# EAGLE board power electronicsV4.5 (EAGLE 9.6.2)
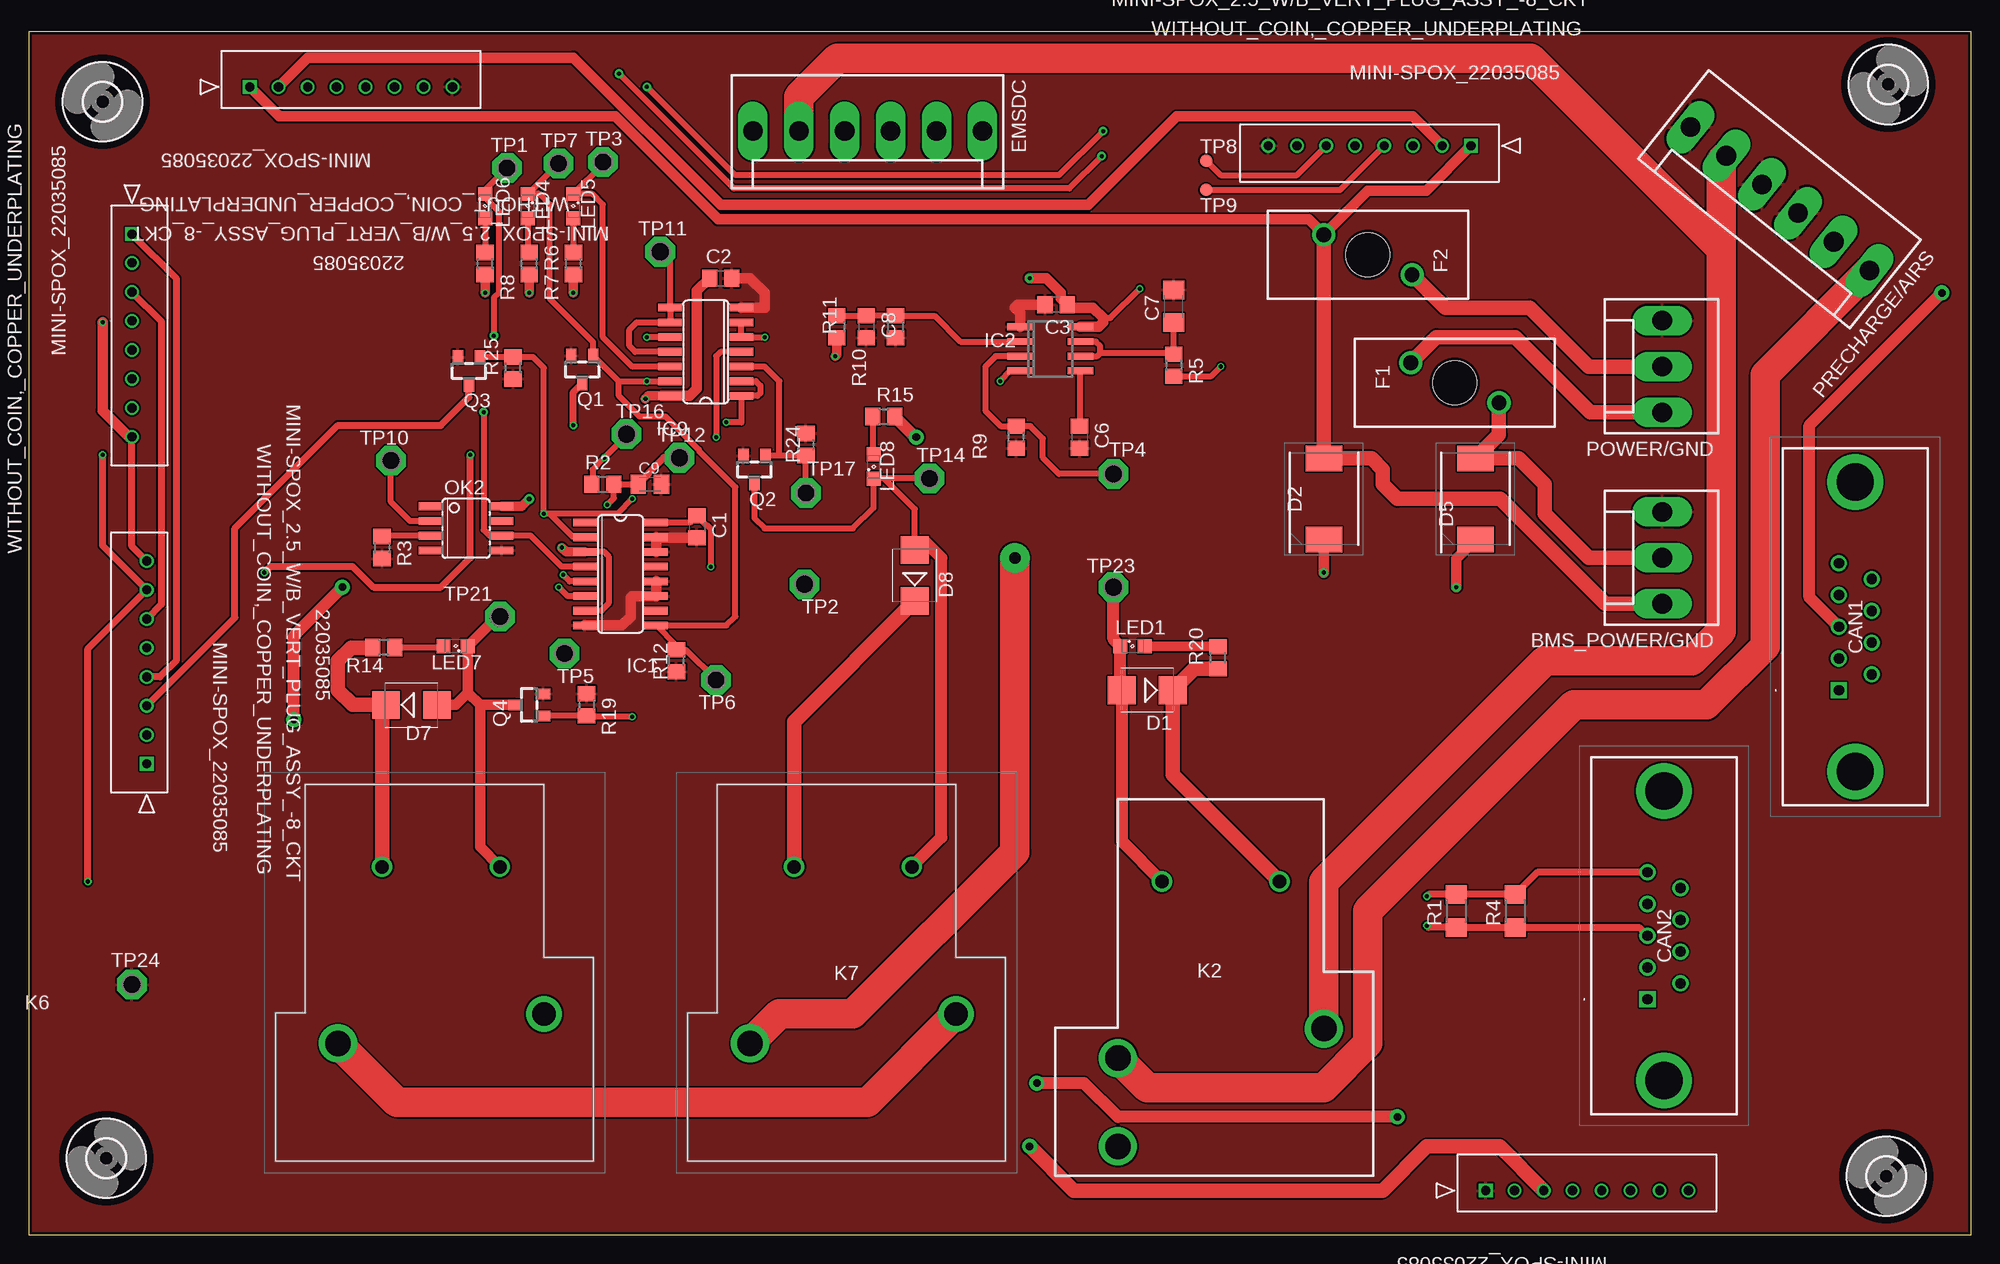
[diagram p0: board, top side]
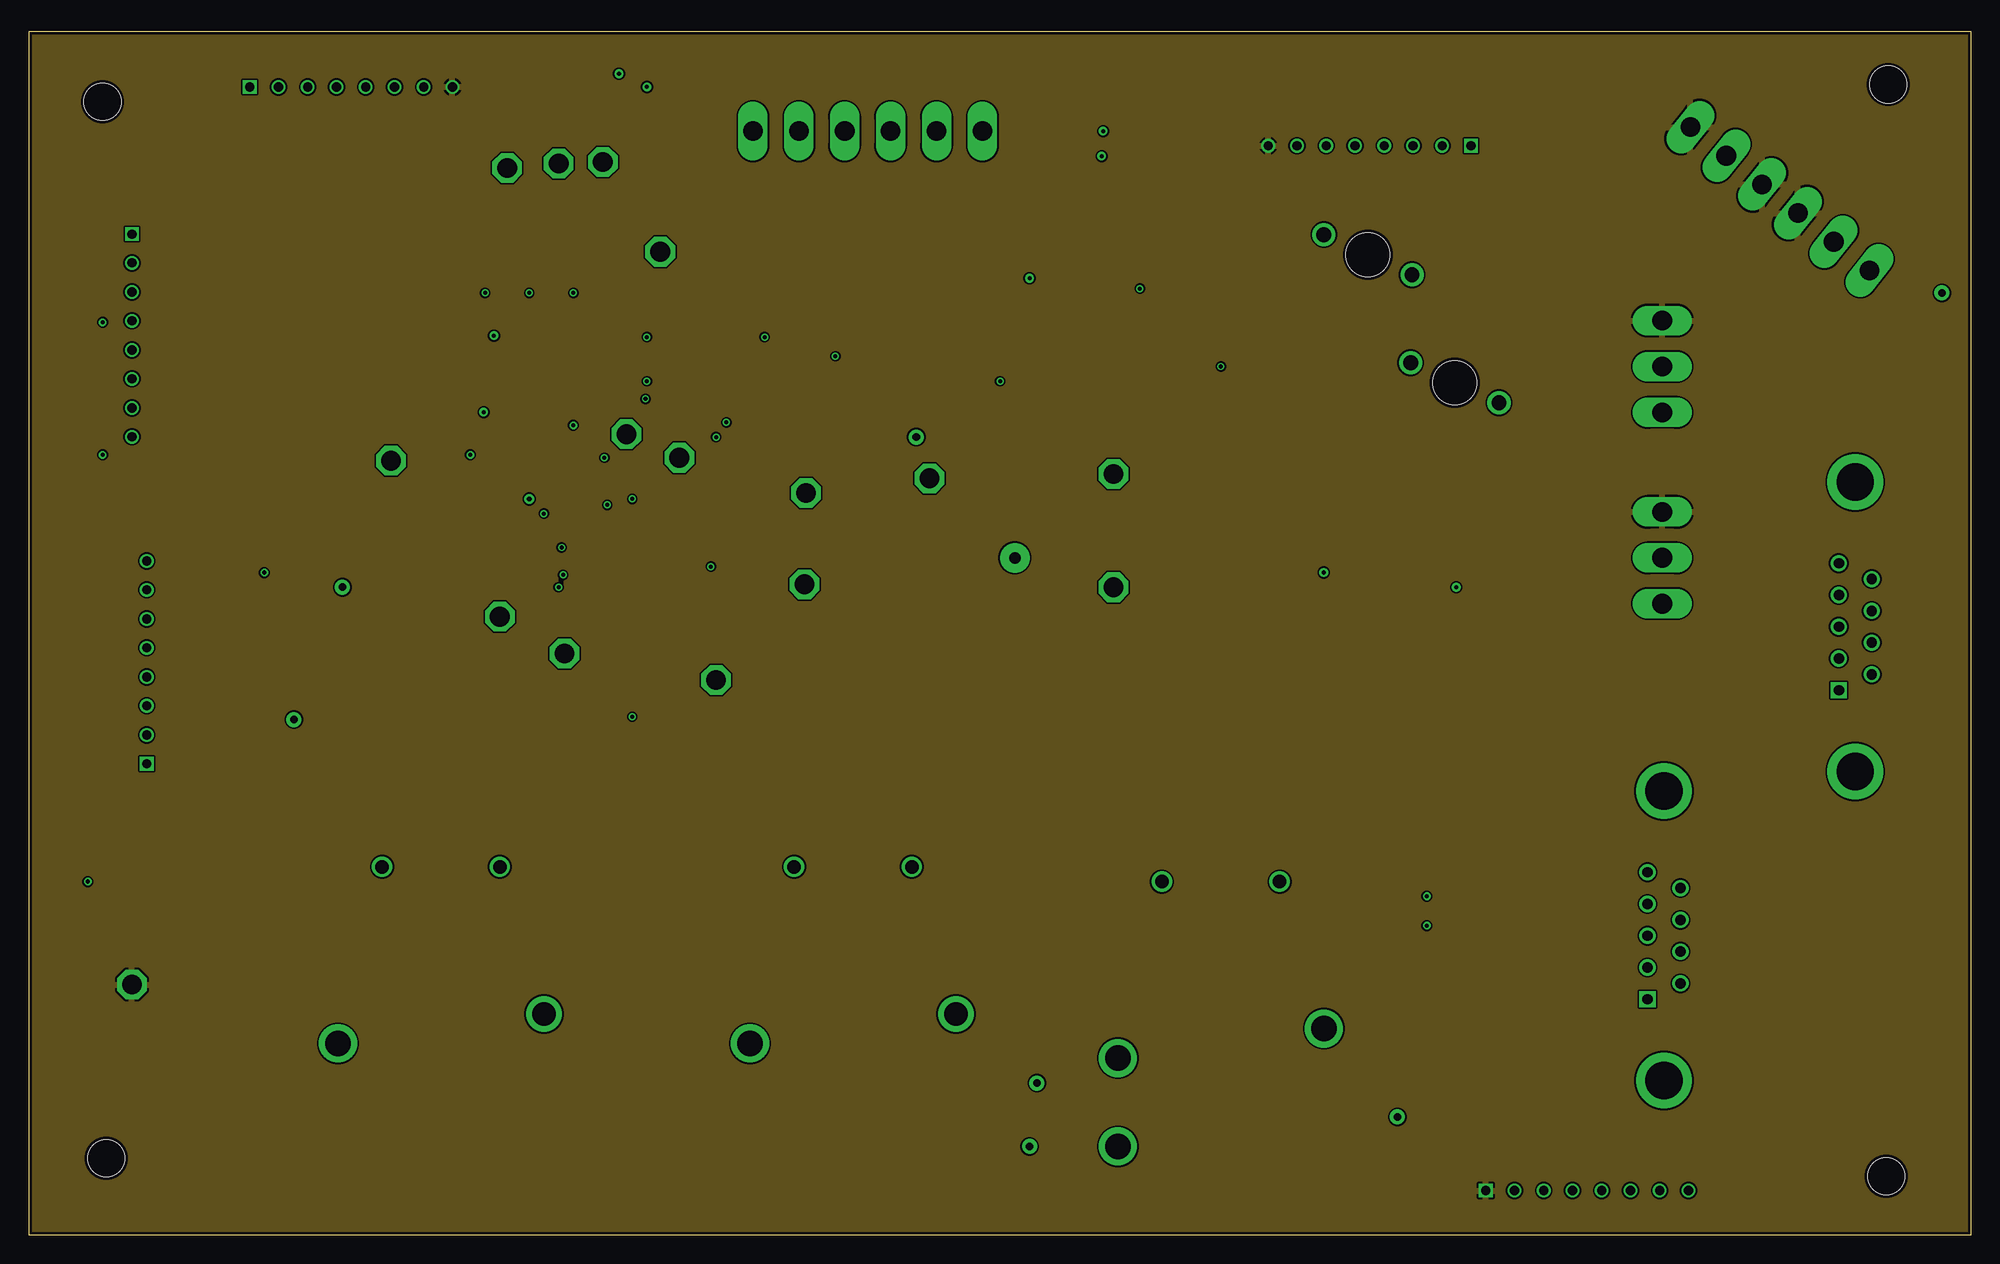
[diagram p1: board, inner layer Route2]
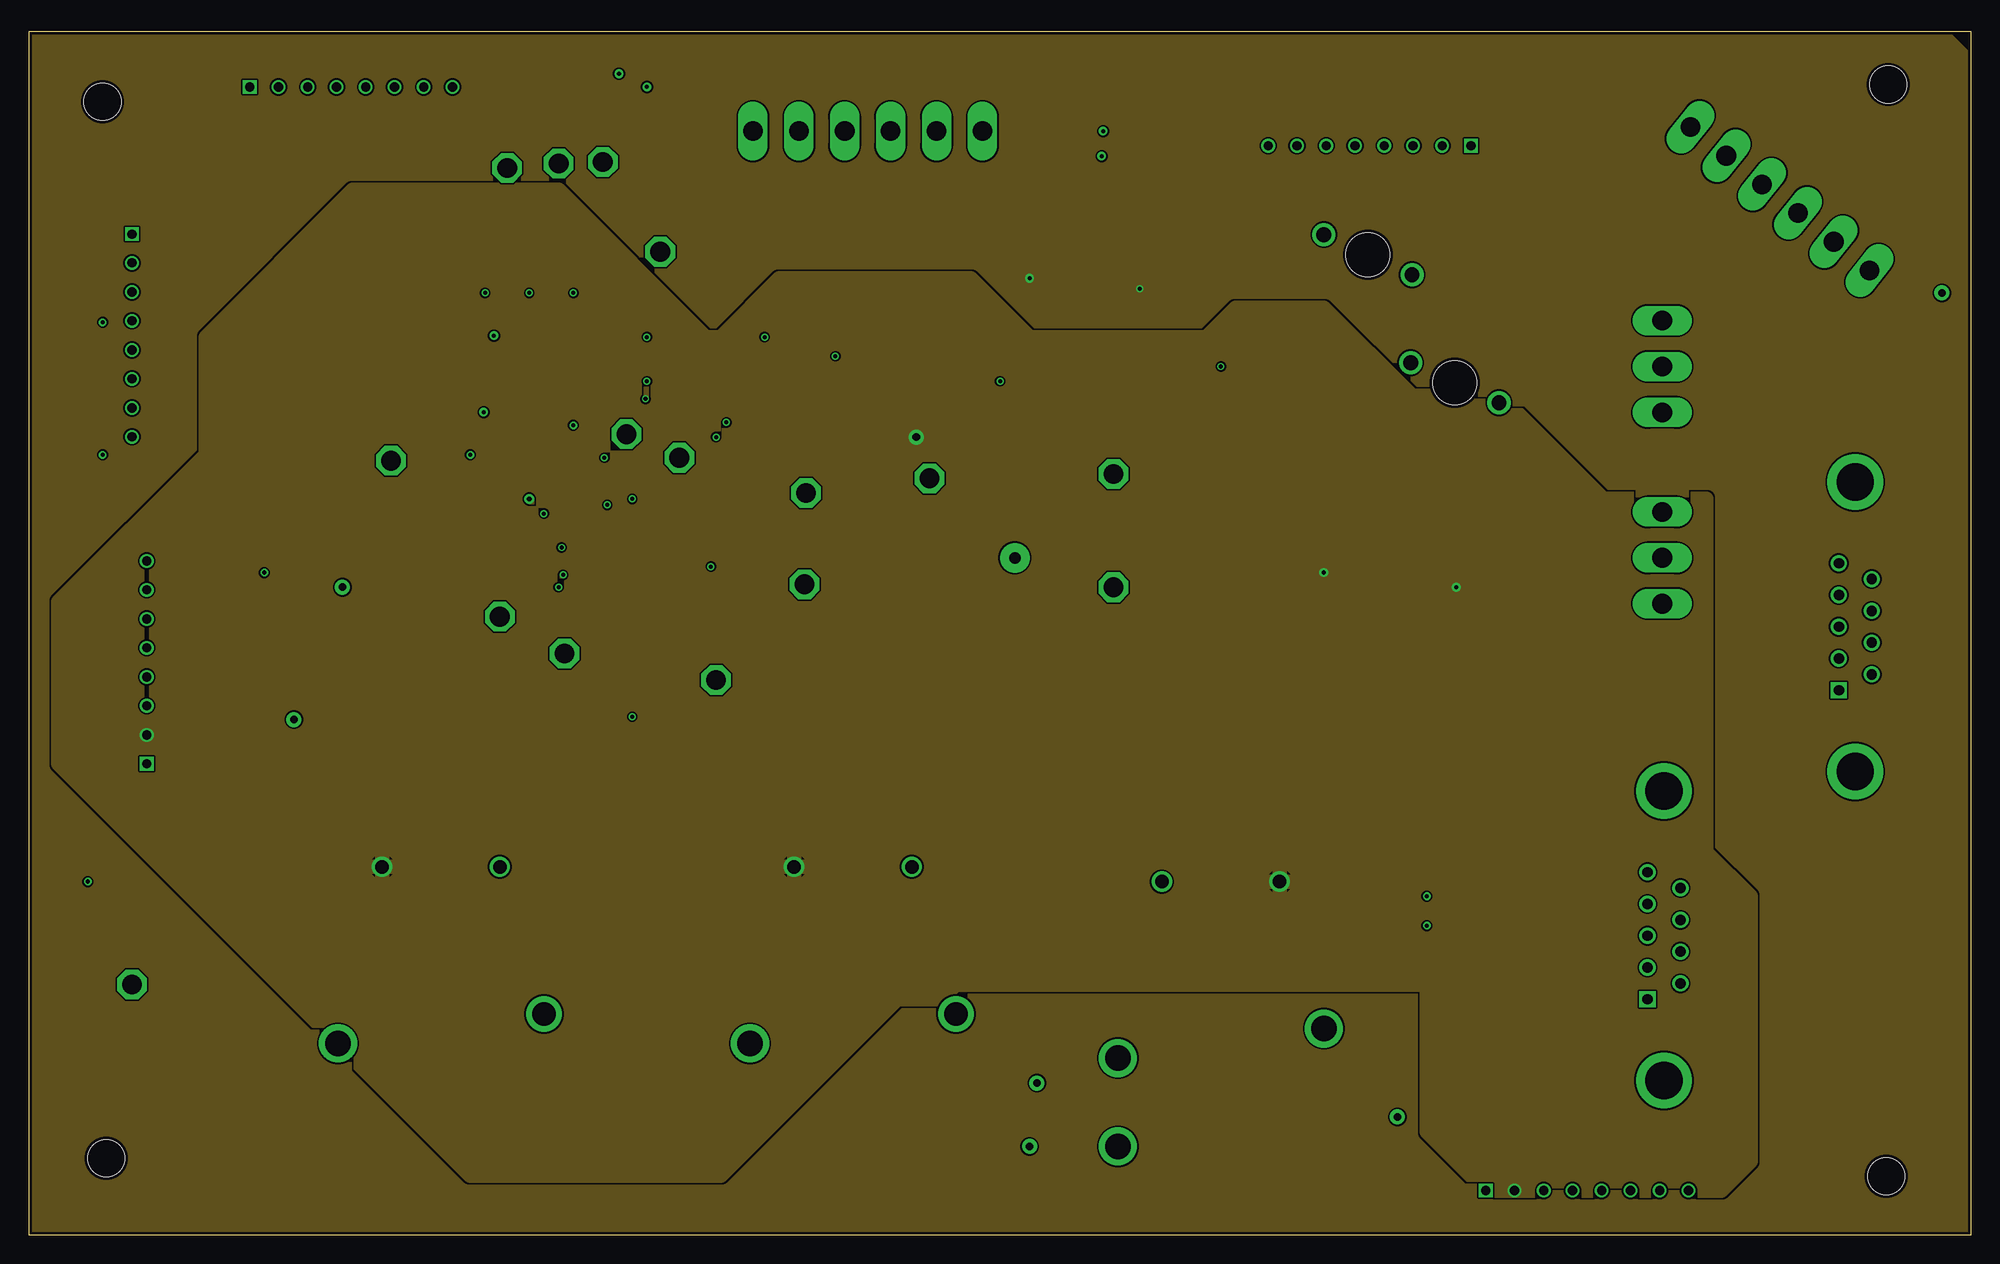
[diagram p2: board, inner layer Route15]
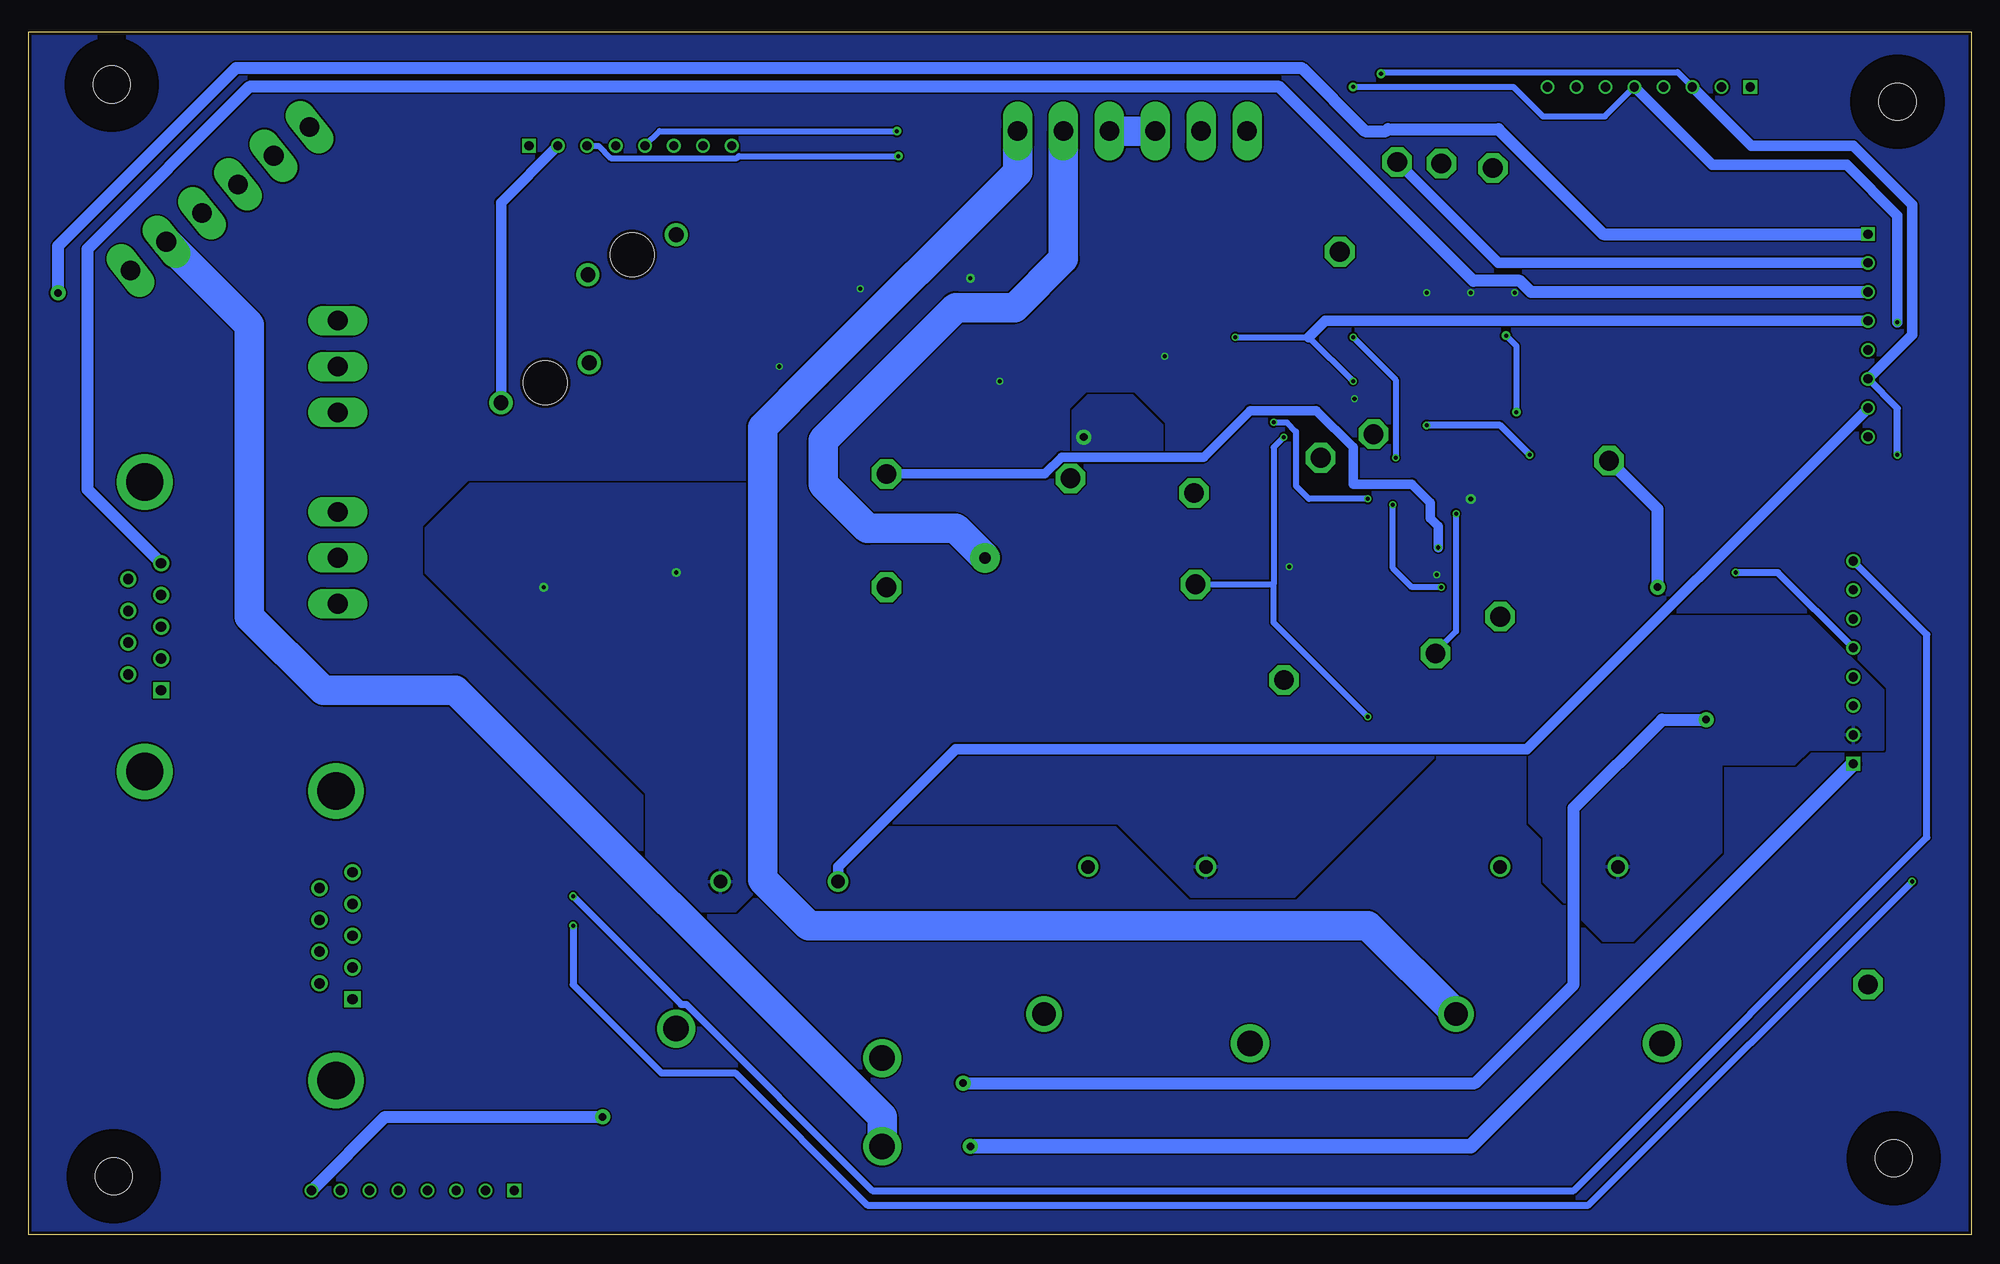
[diagram p3: board, bottom side, seen from below]

Size 167.62 x 103.81 mm. Coordinates in mm from the lower left corner, seen from the top.
Outline: 0,0 167.62,0 167.62,103.81 0,103.81 0,0
Copper layers (1*16): Top 0.018mm / dielectric 1.55mm / Bottom 0.018mm
Design rules "eC_2Layer_PClass6_BaseCopperO18_eCDefault": minimum track width 0.15mm, minimum drill 0.35mm, track to track 0.15mm, track to pad 0.15mm, pad to pad 0.15mm, via to via 0.15mm, smd to smd 0mil, copper to edge 0.25mm, drill to drill 0.35mm, minimum pad ring 0.175mm, minimum via ring 0.125mm, stop-mask expansion 0mil, vias tented up to drill 0.45mm, thermal gap 0.2mm
Net classes: 0 default: width 0.508 mm; 1 GND: width 0.889 mm; 2 EMSDC: width 2.54 mm; 3 power: width 0.889 mm

## Footprints (pad centres in the part's own frame; a part is rotated, then mirrored left to right if it is on the bottom)
CON_22035085_MOL = drill 0.787 pad 1.143 square: 1 0,0 | drill 0.787 pad 1.143: 2 -2.489,0; 3 -5.004,0; 4 -7.493,0; 5 -10.008,0; 6 -12.497,0; 7 -15.011,0; 8 -17.501,0
KK-156-3 = drill 1.7 pad 2.184 long: 1 -3.96,0; 2 0,0; 3 3.96,0
C0805 = smd 1.3 x 1.5: 1 -0.95,0; 2 0.95,0
C1206 = smd 1.6 x 1.8: 1 -1.4,0; 2 1.4,0
C0805K = smd 1.3 x 1.6: 1 -1,0; 2 1,0
LD09P24A4GV00LF = drill 0.9 pad 1.4 square: 1 0,0 | drill 0.9 pad 1.4: 2 2.74,0; 3 5.48,0; 4 8.22,0; 5 10.96,0; 6 1.37,-2.84; 7 4.11,-2.84; 8 6.85,-2.84; 9 9.59,-2.84 | drill 3.2 pad 4.8: MH1 -7.015,-1.42; MH2 17.975,-1.42
SMB = smd 2.4 x 2.4: A 2.2,0; C -2.2,0
DIOM7959X262N = smd 2.2 x 3.15: 1 -3.5,0; 2 3.5,0
KK-156-6 = drill 1.7 pad 2.184 long: 1 -9.9,0; 2 -5.94,0; 3 -1.98,0; 4 1.98,0; 5 5.94,0; 6 9.9,0
01530008 = drill 1.27 pad 2: 1 1.727,3.81; 2 -1.727,-3.81 | hole 3.785: 0,0
3,2 = hole 3.2: 0,0
SO16 = smd 0.66 x 2.032: 1 -4.445,-3.073; 2 -3.175,-3.073; 3 -1.905,-3.073; 4 -0.635,-3.073; 5 0.635,-3.073; 6 1.905,-3.073; 7 3.175,-3.073; 8 4.445,-3.073; 9 4.445,3.073; 10 3.175,3.073; 11 1.905,3.073; 12 0.635,3.073; 13 -0.635,3.073; 14 -1.905,3.073; 15 -3.175,3.073; 16 -4.445,3.073
SO08 = smd 0.6 x 2.2: 1 -1.905,-2.6; 2 -0.635,-2.6; 3 0.635,-2.6; 4 1.905,-2.6; 5 1.905,2.6; 6 0.635,2.6; 7 -0.635,2.6; 8 -1.905,2.6
SO14 = smd 0.66 x 2.032: 1 -3.81,-3.073; 2 -2.54,-3.073; 3 -1.27,-3.073; 4 0,-3.073; 5 1.27,-3.073; 6 2.54,-3.073; 7 3.81,-3.073; 8 3.81,3.073; 9 2.54,3.073; 10 1.27,3.073; 11 0,3.073; 12 -1.27,3.073; 13 -2.54,3.073; 14 -3.81,3.073
T9AS1D12 = drill 2.19 pad 3.29: 1 -8.89,12.7; 2 8.89,15.24; 3 8.89,22.86 | drill 1.17 pad 1.77: 4 -5.08,0; 5 5.08,0
T9AS1D1248T9A = drill 1.17 pad 1.755: 1 0,0; 2 -10.16,0 | drill 2.06 pad 3.09: 3 -13.97,12.7 | drill 2.19 pad 3.3: 4 3.81,15.24
SML0805 = smd 1.2 x 1.2: A 1.05,0; C -1.05,0
SOIC08 = smd 0.66 x 2.032: 1 -1.905,-3.073; 2 -0.635,-3.073; 3 0.635,-3.073; 4 1.905,-3.073; 5 1.905,3.073; 6 0.635,3.073; 7 -0.635,3.073; 8 -1.905,3.073
SOT23 = smd 0.9 x 1.2: 1 -0.95,-1.2; 2 0.95,-1.2; 3 0,1.2
R1206 = smd 1.6 x 1.803: 1 -1.422,0; 2 1.422,0
R0805 = smd 1.3 x 1.5: 1 -0.95,0; 2 0.95,0
P1-17 = drill 1.702 pad 2.54 octagon: TP 0,0
TP11R = smd 1.1 x 1.1: TP 0,0

## Placement (x,y rotation side)
BMS_I/O  MINI-SPOX_22035085  [CON_22035085_MOL]  8.89,86.36 90 top
BMS_POWER/GND  [KK-156-3]  140.97,58.42 90 top
C1  0.1uF  [C0805]  57.66,61.09 270 top
C2  0.1uF  [C0805]  59.69,82.55 0 top
C3  0.1uF  [C0805]  88.65,80.26 180 top
C6  0.1uF  [C0805]  90.68,68.83 270 top
C7  22uF  [C1206]  98.81,80.14 90 top
C8  10uF  [C0805]  72.26,78.36 270 top
C9  DNP  [C0805K]  53.59,64.77 0 top
CAN1  LD09P24A4GV00LF  [LD09P24A4GV00LF]  156.21,46.99 90 top
CAN2  LD09P24A4GV00LF  [LD09P24A4GV00LF]  139.7,20.32 90 top
D1  ES2D  [SMB]  96.52,46.99 180 top
D2  VS-30BQ100-M3_9AT  [DIOM7959X262N]  111.76,63.5 90 top
D5  VS-30BQ100-M3_9AT  [DIOM7959X262N]  124.84,63.5 90 top
D7  ES2D  [SMB]  33.02,45.72 0 top
D8  ES2D  [SMB]  76.45,56.9 90 top
EMSDC  [KK-156-6]  72.39,95.25 180 top
F1  01530008Z  [01530008]  123.06,73.53 270 top
F2  01530008Z  [01530008]  115.57,84.58 90 top
H1  MOUNT-HOLE3.2  [3,2]  6.35,97.79 90 top
H2  MOUNT-HOLE3.2  [3,2]  6.68,6.6 0 top
H3  MOUNT-HOLE3.2  [3,2]  160.48,99.28 0 top
H4  MOUNT-HOLE3.2  [3,2]  160.3,5.04 90 top
IC1  4043D  [SO16]  51.05,57.02 270 top
IC2  SE555D  [SO08]  88.14,76.45 270 top
IC9  4011D  [SO14]  58.42,76.2 90 top
ISOMETER_I/O  MINI-SPOX_22035085  [CON_22035085_MOL]  125.73,3.81 180 top
K2  T9AS5D12-12=T9A  [T9AS1D12]  102.87,30.48 180 top
K6  T9AS1D12-48=T9A  [T9AS1D1248T9A]  30.48,31.75 180 top
K7  T9AS1D12-48=T9A  [T9AS1D1248T9A]  66.04,31.75 180 top
LED1  [SML0805]  95.25,50.8 0 top
LED4  [SML0805]  43.05,88.77 270 top
LED5  [SML0805]  46.99,88.77 270 top
LED6  [SML0805]  39.37,88.77 270 top
LED7  [SML0805]  36.83,50.8 180 top
LED8  [SML0805]  72.9,66.29 90 top
MISC_I/O  MINI-SPOX_22035085  [CON_22035085_MOL]  10.16,40.64 270 top
OK2  HCPL0453  [SOIC08]  37.72,60.96 270 top
POWER/GND  [KK-156-3]  140.97,74.93 90 top
PRECHARGE/AIRS  [KK-156-6]  151.13,89.41 141.3 top
Q1  BSS138  [SOT23]  47.75,74.68 180 top
Q2  BSS138  [SOT23]  62.61,66.04 180 top
Q3  BSS138  [SOT23]  37.97,74.55 180 top
Q4  BSS138  [SOT23]  43.18,45.72 90 top
R1  120  [R1206]  123.19,27.94 90 top
R2  0R  [R0805]  49.53,64.77 0 top
R3  2.2K  [R0805]  30.48,59.31 270 top
R4  120  [R1206]  128.27,27.94 90 top
R5  100K  [R0805]  98.81,75.06 270 top
R6  330  [R0805]  46.99,83.82 90 top
R7  330  [R0805]  43.18,83.82 90 top
R8  330  [R0805]  39.37,83.82 90 top
R9  10K  [R0805]  85.22,68.83 90 top
R10  200K  [R0805]  69.72,78.36 270 top
R11  510K  [R0805]  74.8,78.36 90 top
R12  [R0805]  55.88,49.53 90 top
R14  [R0805]  30.61,50.67 180 top
R15  [R0805]  73.79,70.61 0 top
R19  [R0805]  48.13,45.72 270 top
R20  1.2K  [R0805]  102.62,49.78 90 top
R24  [R0805]  67.06,68.2 270 top
R25  [R0805]  41.78,74.8 90 top
THERMAL_EX_I/0  MINI-SPOX_22035085  [CON_22035085_MOL]  124.46,93.98 0 top
TP1  TPPAD1-17  [P1-17]  41.27,92.08 0 top
TP2  TPPAD1-17  [P1-17]  66.93,56.13 0 top
TP3  TPPAD1-17  [P1-17]  49.53,92.58 0 top
TP4  TPPAD1-17  [P1-17]  93.6,65.66 0 top
TP5  TPPAD1-17  [P1-17]  46.23,50.16 0 top
TP6  TPPAD1-17  [P1-17]  59.31,47.88 0 top
TP7  TPPAD1-17  [P1-17]  45.72,92.46 0 top
TP8  TPSTP11R  [TP11R]  101.6,92.71 0 top
TP9  TPSTP11R  [TP11R]  101.6,90.17 0 top
TP10  TPPAD1-17  [P1-17]  31.24,66.8 0 top
TP11  TPPAD1-17  [P1-17]  54.48,84.84 0 top
TP12  TPPAD1-17  [P1-17]  56.13,67.06 0 top
TP14  TPPAD1-17  [P1-17]  77.72,65.28 0 top
TP16  TPPAD1-17  [P1-17]  51.56,69.09 0 top
TP17  TPPAD1-17  [P1-17]  67.06,64.01 0 top
TP21  TPPAD1-17  [P1-17]  40.64,53.34 0 top
TP23  TPPAD1-17  [P1-17]  93.6,55.88 0 top
TP24  TPPAD1-17  [P1-17]  8.89,21.59 0 top
WIFI_MODULE  MINI-SPOX_22035085  [CON_22035085_MOL]  19.05,99.06 180 top

## Library data of the parts
BMS_I/O ISOMETER_I/O MISC_I/O THERMAL_EX_I/0 WIFI_MODULE = Mini-spox_22035085; COPYRIGHT: Copyright (C) 2023 Ultra Librarian. All rights reserved.; MANUFACTURER_PART_NUMBER: 22035085; MFR_NAME: Molex Connector Corporation
BMS_POWER/GND EMSDC POWER/GND PRECHARGE/AIRS = con-molex; MF: MOLEX; OC_FARNELL: unknown; OC_NEWARK: unknown
C1-C3 C6-C9 = rcl; SPICEPREFIX: C
CAN1 CAN2 = LD09P24A4GV00LF; ARROW_PART_NUMBER: LD09P24A4GV00LF; ARROW_PRICE-STOCK: https://www.arrow.com/en/products/ld09p24a4gv00lf/amphenol-fci?region=nac; DESCRIPTION: Amphenol FCI LD Series, 9 Way Plug-In Mount D-sub Connector Plug, 2.74mm Pitch, with Screw; HEIGHT: 12.15mm; MANUFACTURER_NAME: Amphenol Communication Solutions; MANUFACTURER_PART_NUMBER: LD09P24A4GV00LF; MOUSER_PART_NUMBER: 649-LD09P24A4GV00LF; MOUSER_PRICE-STOCK: https://www.mouser.co.uk/ProductDetail/Amphenol-FCI/LD09P24A4GV00LF?qs=tZOhSuJQg1nfkziarphghA%3D%3D
D1 D7 D8 = diode
D2 D5 = SamacSys_Parts; DESCRIPTION: Vishay VS-30BQ100-M3/9AT SMT Schottky Diode, 100V 3A, 2-Pin DO-214AB; HEIGHT: 2.62mm; MANUFACTURER_NAME: Vishay; MANUFACTURER_PART_NUMBER: VS-30BQ100-M3/9AT; MOUSER_PART_NUMBER: 78-VS-30BQ100-M39AT; MOUSER_PRICE-STOCK: https://www.mouser.com/Search/Refine.aspx?Keyword=78-VS-30BQ100-M39AT
F1 F2 = SamacSys_Parts; ALLIED_NUMBER: 70184304; DESCRIPTION: Mini fuseholder,15A 32V Littelfuse 15A PCB Mount Fuse Holder Automotive Fuse, 32 V; HEIGHT: mm; MANUFACTURER_NAME: LITTELFUSE; MANUFACTURER_PART_NUMBER: 01530008Z; RS_PART_NUMBER: 3607317; RS_PRICE-STOCK: https://uk.rs-online.com/web/p/products/3607317
H1-H4 = holes
IC1 IC9 = 40xx
IC2 = linear
K2 = SamacSys_Parts; ALLIED_NUMBER: R1111589; DESCRIPTION: PCB Relay SPDT 30A 12Vdc,thru hole SPDT PCB Mount Non-Latching Relay Through Hole, 12V dc; HEIGHT: mm; MANUFACTURER_NAME: TE Connectivity; MANUFACTURER_PART_NUMBER: T9AS5D12-12=T9A; RS_PART_NUMBER: 6802528; RS_PRICE-STOCK: https://uk.rs-online.com/web/p/products/6802528
K6 K7 = T9AS1D12-12=T9A; DESCRIPTION: SPST-NO PCB Mount Non-Latching Relay Through Hole, 48V dc; HEIGHT: 20.4mm; MANUFACTURER_NAME: TE Connectivity; MANUFACTURER_PART_NUMBER: T9AS1D12-48=T9A
LED1 LED4-LED8 = led
OK2 = optocoupler; MF: AGILENT TECHNOLOGIES; MPN: HCPL-0453-000E; OC_FARNELL: 1505123; OC_NEWARK: 88H7766
Q1-Q4 = m-pad-2.1
R1-R12 R14 R15 R19 R20 R24 R25 = rcl; SPICEPREFIX: R
TP1-TP12 TP14 TP16 TP17 TP21 TP23 TP24 = testpad

## Nets
+3V3: C1.1 C2.1 C3.1 IC1.5 IC1.16 IC2.4 IC2.8 IC9.14 OK2.8 R5.2 R6.1 R7.1 R8.1 R10.2
+12V [power]: D1.C D2.1 D5.1 D7.C D8.C ISOMETER_I/O.2 K2.4 K6.1 K7.1 MISC_I/O.2 R14.2 R15.2 R20.1
AMS_LED-: MISC_I/O.5 Q1.3
CAN1_H: BMS_I/O.1 CAN1.3 MISC_I/O.4
CAN1_L: BMS_I/O.3 CAN1.5 MISC_I/O.6
CAN2_H: BMS_I/O.6 CAN2.3 MISC_I/O.7 R1.1 R4.1 THERMAL_EX_I/0.3 WIFI_MODULE.3
CAN2_L: BMS_I/O.8 CAN2.5 MISC_I/O.8 R1.2 R4.2 THERMAL_EX_I/0.5 WIFI_MODULE.5
CHARGE_POWER [power]: BMS_POWER/GND.2 D5.2 F1.1 THERMAL_EX_I/0.2 WIFI_MODULE.2
CHARGE_SAFE: BMS_I/O.2 IC9.12 LED5.C TP3.TP
CHASSIS_GND [GND]: ISOMETER_I/O.3 MISC_I/O.1
DISCHARGE_ENABLE: BMS_I/O.4 IC1.9 IC9.5 IC9.6 IC9.13 LED4.C Q1.1 R12.2 TP6.TP TP7.TP
GND [GND]: BMS_POWER/GND.3 C1.2 C2.2 C3.2 C6.2 C7.2 C8.2 C9.2 IC1.8 IC1.11 IC1.12 IC1.14 IC1.15 IC2.1 IC9.7 ISOMETER_I/O.1 OK2.5 POWER/GND.3 PRECHARGE/AIRS.3 PRECHARGE/AIRS.4 PRECHARGE/AIRS.6 Q1.2 Q2.2 Q3.2 Q4.2 R3.2 R9.1 R11.1 R12.1 R19.1 R24.1 R25.1 THERMAL_EX_I/0.8 TP24.TP WIFI_MODULE.8
HIGHEST_TEMP: THERMAL_EX_I/0.4 TP9.TP
IMD_COIL_OUT: D8.A K7.2 LED8.C Q2.3 TP14.TP
IMD_LED-: MISC_I/O.3 Q3.3
LOWEST_TEMP: THERMAL_EX_I/0.6 TP8.TP
M_HS: ISOMETER_I/O.5
N$1: IC9.10 R2.1 TP16.TP
N$2 [power]: F2.2 POWER/GND.2
N$3 [EMSDC]: K2.2 PRECHARGE/AIRS.1
N$4 [power]: F1.2 POWER/GND.1
N$5: IC1.4 LED6.C OK2.6 TP1.TP
N$6: IC9.8 IC9.9 IC9.11 TP11.TP
N$7: OK2.3 R3.1
N$8: IC9.3 Q2.1 R24.2 TP17.TP
N$9: IC1.2 IC9.1 IC9.2 Q3.1 R25.2 TP5.TP
N$10: C9.1 IC1.6 R2.2 TP12.TP
N$11 [EMSDC]: EMSDC.5 K2.1 PRECHARGE/AIRS.5
N$12 [EMSDC]: K2.3 PRECHARGE/AIRS.2
N$14: EMSDC.2 K7.4
N$15 [GND]: D7.A K6.2 LED7.C Q4.3 TP21.TP
N$16: IC9.4 Q4.1 R19.2 TP2.TP
N$17: C7.1 IC2.6 IC2.7 R5.1
N$18: LED7.A R14.1
N$19 [EMSDC]: EMSDC.3 EMSDC.4
N$20: LED8.A R15.1
N$21 [GND]: K6.4 K7.3
N$22: LED1.A R20.2
N$25: LED4.A R7.2
N$26: LED5.A R6.2
N$27: LED6.A R8.2
N$28: C8.1 IC2.2 R10.1 R11.2
N$32: C6.1 IC2.5
N$46: ISOMETER_I/O.4
N$51: ISOMETER_I/O.7
N$52: ISOMETER_I/O.6
OK_HS: ISOMETER_I/O.8 OK2.2 TP10.TP
PRECHARGE_EMSDC2: EMSDC.1 K6.3
PRECHARGE_SELECT: BMS_I/O.7 D1.A K2.5 LED1.C TP23.TP
READY_POWER [power]: BMS_POWER/GND.1 D2.2 F2.1 THERMAL_EX_I/0.1 WIFI_MODULE.1
STARTUP_RESET: IC1.3 IC1.7 IC2.3 R9.2 TP4.TP

## Tracks (layer width: path | path; a pad name or v marks a point on that pad's centre or on a via)
+3V3  (via drill 0.35, 0.35 pad 0.6, 0.35 pad 0.75, 0.4 pad 0.85)
  Top 0.508: IC1.16 57.09,61.47 C1.1 58.5,61.19 58.58,61.19 58.86,60.91 v58.86,57.66 | IC1.5 46.67,56.39 v46.1,56.95 | R5.2 102.05,74.11 v102.87,74.93 | 92.71,79.12 93.34,79.12 v95.89,81.66 | IC2.4 84.71,74.55 v83.82,73.66
  Top 0.813: IC9.14 54.61,72.39 53.47,72.39 v53.21,72.14 | R6.1 v46.99,81.28 | R7.1 v43.18,81.28 | R8.1 v39.37,81.28 | R10.2 69.72,75.95 v69.6,75.82 | OK2.8 42.55,62.87 v43.18,63.5
  Top 0.889: C2.1 57.66,81.47 57.66,73.03 57.02,72.39 54.61,72.39 | IC2.8 92.33,78.36 92.71,78.74 92.71,79.12 91.82,80.01 89.85,80.01 C3.1 89.04,80.82 89.04,81.3 87.8,82.55 v86.36,82.55
  pour Route15 (rank 2): 0,104.14 165.1,104.14 167.64,101.6 167.64,0 1.27,0 0,-1.27
  pour Bottom (rank 4): -5.08,105.41 -5.08,-2.54 -7.62,-5.08 170.18,-5.08 176.53,1.27 176.53,97.79 167.64,106.68 167.64,111.76 161.29,105.41
+12V  (via drill 0.35 pad 0.75, 0.65 pad 1.3)
  Top 0.889: D2.1 v111.76,57.15 | D5.1 123.19,58.35 v123.19,55.88
  Top 1.016: R15.2 76.52,68.83 v76.58,68.83
  Top 1.27: R20.1 100.56,48.83 D1.C 98.72,39.71 K2.4 | K7.1 66.04,44.28 D8.C | K6.1 30.48,45.38 D7.C 27.94,45.72 26.67,46.99 26.67,49.53 27.81,50.67 R14.2
  pour Route15: 59.69,5.08 38.1,5.08 2.54,40.64 2.54,54.61 15.24,67.31 15.24,77.47 27.94,90.17 45.72,90.17 58.42,77.47 59.69,77.47 64.77,82.55 81.28,82.55 86.36,77.47 101.6,77.47 104.14,80.01 111.76,80.01 119.38,72.39 127,72.39 135.89,63.5 144.78,63.5 144.78,33.02 148.59,29.21 148.59,6.35 146.05,3.81 125.73,3.81 120.65,8.89 120.65,21.59 80.01,21.59 78.74,20.32 74.93,20.32
  pour Bottom: 21.59,40.64 21.59,33.02 29.21,25.4 31.75,25.4 36.83,30.48 36.83,34.29 38.1,35.56 38.1,45.72 39.37,46.99 40.64,46.99 58.42,29.21 67.31,29.21 73.66,35.56 99.06,35.56 106.68,27.94 110.49,27.94 114.3,31.75 114.3,38.1 133.35,57.15 133.35,60.96 129.54,64.77 85.09,64.77 82.55,62.23 81.28,62.23 77.47,66.04 77.47,71.12 76.2,72.39 72.39,72.39 69.85,69.85 69.85,53.34 68.58,52.07 55.88,52.07 54.61,53.34 48.26,46.99 45.72,46.99 43.18,49.53 40.64,49.53 36.83,53.34 13.97,53.34 7.62,46.99 7.62,41.91 13.97,41.91 15.24,40.64
AMS_LED-  (via drill 0.35 pad 0.65)
  Top 0.61: v20.32,57.15 20.83,57.66 27.94,57.66 29.72,55.88 35.56,55.88 38.1,58.42 v38.1,67.31 | v46.99,69.85 46.99,72.71 Q1.3
  Bottom 0.61: MISC_I/O.5 16.66,57.15 v20.32,57.15 | v38.1,67.31 40.64,69.85 v46.99,69.85
CAN1_H  (via drill 0.65 pad 1.3)
  Top 0.61: BMS_I/O.1 12.7,82.55 12.7,49.53 11.3,48.13 MISC_I/O.4
  Top 1.016: CAN1.3 153.67,55.01 153.67,69.85 v165.1,81.28
  Bottom 1.016: v165.1,81.28 165.1,85.34 149.73,100.71 57.78,100.71 52.32,95.25 50.49,95.25 50.33,95.41 40.8,95.41 31.75,86.36 BMS_I/O.1
CAN1_L
  Top 0.61: BMS_I/O.3 11.43,78.82 11.43,54.41 MISC_I/O.6
  Bottom 1.016: CAN1.5 162.56,64.3 162.56,85.09 148.59,99.06 59.69,99.06 42.95,82.32 38.94,82.32 37.98,81.36 BMS_I/O.3
CAN2_H  (via drill 0.35 pad 0.65, 0.35 pad 0.75)
  Top 0.508: v92.58,93.09 89.79,90.3 60.83,90.3 v50.93,100.2
  Top 0.61: v6.35,67.31 6.35,59.46 MISC_I/O.7 5.08,50.57 v5.08,30.48 | CAN2.3 138.98,26.52 R4.1 R1.1 120.8,26.52 v120.65,26.67
  Bottom 0.508: THERMAL_EX_I/0.3 118.46,93.98 117.4,92.93 106.52,92.93 106.36,93.09 v92.58,93.09 | v50.93,100.2 50.93,100.29 50.89,100.33 25.32,100.33 WIFI_MODULE.3
  Bottom 0.61: v6.35,67.31 6.35,71.32 BMS_I/O.6 | v120.65,26.67 120.65,21.59 113.03,13.97 106.68,13.97 95.25,2.54 33.02,2.54 v5.08,30.48
  Bottom 0.889: WIFI_MODULE.3 18.97,93.98 10.16,93.98 5.08,88.9 5.08,77.67 BMS_I/O.6
CAN2_L  (via drill 0.35 pad 0.65, 0.35 pad 0.75)
  Top 0.508: v92.71,95.25 88.9,91.44 60.96,91.44 v53.34,99.06
  Top 0.61: MISC_I/O.8 8.89,59.41 BMS_I/O.8 | CAN2.5 130.19,31.28 R4.2 R1.2 120.8,29.36 v120.65,29.21
  Top 0.889: v6.35,78.74 6.35,71.12 8.61,68.86 BMS_I/O.8
  Bottom 0.508: THERMAL_EX_I/0.5 113.18,95.25 v92.71,95.25 | v53.34,99.06 39.5,99.06 36.96,96.52 31.6,96.52 WIFI_MODULE.5
  Bottom 0.61: v120.65,29.21 111.32,19.88 110.89,19.88 94.82,3.81 34.29,3.81 3.81,34.29 3.81,51.79 MISC_I/O.8
  Bottom 0.889: WIFI_MODULE.5 22.33,92.33 10.74,92.33 6.35,87.94 v6.35,78.74
CHARGE_POWER
  Top 0.889: WIFI_MODULE.2 24.08,101.6 46.99,101.6 59.69,88.9 91.44,88.9 99.06,96.52 119.43,96.52 THERMAL_EX_I/0.2
  Top 1.27: F1.1 126.87,69.03 D5.2 128.58,67 130.81,64.77 130.81,62.23 134.62,58.42 BMS_POWER/GND.2
  Bottom 0.889: THERMAL_EX_I/0.2 126.87,89.08 F1.1
CHARGE_SAFE
  Top 0.508: TP3.TP 49.53,92.36 LED5.C 48.61,89.82 49.53,88.9 49.53,77.47 52.07,74.93 IC9.12
  Bottom 0.889: BMS_I/O.2 40.82,83.87 TP3.TP
CHASSIS_GND  (via drill 0.65 pad 1.3)
  Top 1.27: v86.36,7.62 90.17,3.81 116.84,3.81 120.65,7.62 126.92,7.62 ISOMETER_I/O.3
  Bottom 1.27: MISC_I/O.1 43.18,7.62 v86.36,7.62
DISCHARGE_ENABLE  (via drill 0.35)
  Top 0.508: TP7.TP 43.09,89.82 LED4.C 44.03,89.82 44.96,88.9 44.96,80.77 48.7,77.03 Q1.1 50.92,73.66 | 50.92,73.66 v53.34,73.66 IC9.13 | TP6.TP 56.71,50.48 R12.2 55.88,50.83 IC1.9 60.2,52.58 60.96,53.34 60.96,64.52 57.81,67.66 57.81,67.75 54.95,70.61 54.61,70.61 54.23,70.61 52.7,70.61 50.92,72.4 50.92,73.66 | IC9.6 IC9.5 v63.5,77.47
  Bottom 0.508: v63.5,77.47 57.15,77.47 v53.34,73.66
  Bottom 0.889: BMS_I/O.4 55.75,78.87 57.15,77.47
GND
  Top 0.889: C2.2 62.23,82.55 63.5,81.28 63.5,80.01 IC9.7 | C1.2 54.19,60.14 IC1.15 IC1.14 | IC1.12 IC1.11 52.07,55.12 51.94,54.99 51.94,53.34 51.18,52.58 IC1.8 | IC2.1 85.54,79.56 85.09,80.01 85.34,80.26 C3.2
  pour Route2: 0,104.14 167.64,104.14 167.64,-1.27 0,-1.27
  pour Top: -6.35,105.41 170.18,105.41 173.99,101.6 173.99,2.54 167.64,-3.81 167.64,-6.35 3.81,-6.35 -8.89,6.35 -8.89,97.79
HIGHEST_TEMP
  Top 0.508: THERMAL_EX_I/0.4 113.16,90.17 TP9.TP
IMD_COIL_OUT
  Top 0.508: D8.A 76.45,62.61 73.79,65.28 | 73.79,65.28 72.93,65.28 LED8.C 72.9,62.74 71.12,60.96 63.5,60.96 62.61,61.85 Q2.3 | TP14.TP 73.79,65.28
  Top 1.016: K7.2 78.74,34.29 78.74,58.42 77.47,59.69 77.05,59.69 D8.A
IMD_LED-
  Top 0.61: MISC_I/O.3 17.78,53.26 17.78,60.96 26.67,69.85 35.56,69.85 37.97,72.26 Q3.3
LOWEST_TEMP
  Top 0.508: TP8.TP 102.87,91.44 109.42,91.44 THERMAL_EX_I/0.6
N$1  (via drill 0.35)
  Top 0.508: IC9.10 v53.34,77.47 | R2.1 48.64,64.78 48.64,66.04 v49.66,67.06 51.56,68.96 TP16.TP
  Bottom 0.508: v53.34,77.47 49.66,73.79 v49.66,67.06
N$2
  Top 1.27: F2.2 122.22,80.01 129.54,80.01 134.62,74.93 POWER/GND.2
N$3
  Top 2.54: K2.2 96.52,12.7 111.76,12.7 115.57,16.51 115.57,27.94 133.35,45.72 144.78,45.72 149.86,50.8 149.86,74.22 PRECHARGE/AIRS.1
N$4
  Top 1.27: F1.2 121.46,77.47 128.27,77.47 134.77,70.97 POWER/GND.1
N$5  (via drill 0.35 pad 0.75)
  Top 0.508: TP1.TP 39.37,90.17 LED6.C 39.37,89.5 40.53,88.34 40.53,81.29 40.13,80.89 v40.13,77.6 | IC1.4 45.97,57.66 43.31,60.33 OK2.6 39.75,60.33 39.24,60.83 v39.24,70.99
  Bottom 0.508: v40.13,77.6 39.24,76.71 v39.24,70.99
N$6
  Top 0.508: IC9.11 52.32,76.2 51.82,76.71 51.82,78.11 52.45,78.74 IC9.9 IC9.8 55.35,83.97 TP11.TP
N$7
  Top 0.508: OK2.3 30.55,60.33 R3.1
N$8
  Top 0.508: 64.77,67.25 R24.2 TP17.TP | 64.77,67.25 Q2.1 | 64.77,67.25 64.77,73.66 63.5,74.93 IC9.3
N$9  (via drill 0.35, 0.35 pad 0.6)
  Top 0.508: R25.2 | R25.2 Q3.1 | IC1.2 46.99,60.2 44.96,62.23 v44.45,62.23 | R25.2 43.5,75.75 44.45,74.8 v44.45,62.23 | IC9.2 62.74,73.66 63.12,73.28 63.12,72.64 62.87,72.39 IC9.1 61.49,70.1 v60.2,70.1 | v52.07,63.5 50.8,62.23 v44.45,62.23
  Bottom 0.508: TP5.TP 46.23,50.29 44.45,52.07 v44.45,62.23 | v52.07,63.5 57.15,63.5 58.27,64.62 58.27,69.32 59.05,70.1 v60.2,70.1
N$10  (via drill 0.35)
  Top 0.508: C9.1 R2.2 50.48,63.56 v49.91,62.99 | IC1.6 46.48,55.12 v45.72,55.88
  Top 0.61: C9.1 53.49,65.66 53.49,65.76 54.78,67.06 TP12.TP
  Bottom 0.508: v45.72,55.88 48.26,55.88 49.91,57.53 v49.91,62.99
N$11
  Top 2.54: K2.1 111.76,30.48 130.81,49.53 143.51,49.53 146.05,52.07 146.05,85.09 | PRECHARGE/AIRS.5 146.05,92.68 146.05,85.09 | 146.05,85.09 129.62,101.52 69.77,101.52 66.45,98.2 EMSDC.5
N$12
  Bottom 2.54: PRECHARGE/AIRS.2 148.59,78.52 148.59,53.34 142.24,46.99 130.81,46.99 93.98,10.16 K2.3
N$14  (via drill 1 pad 2.54)
  Top 2.54: K7.4 64.77,19.05 71.12,19.05 85.09,33.02 v85.09,58.42
  Bottom 2.54: v85.09,58.42 87.63,60.96 95.25,60.96 99.06,64.77 99.06,68.58 87.63,80.01 82.55,80.01 78.33,84.23 EMSDC.2
N$15
  Top 0.889: TP21.TP 40.42,53.34 LED7.C 37.88,46.77 | 37.88,46.77 36.83,45.72 D7.A | Q4.3 38.93,45.72 | 38.93,45.72 37.88,46.77 | K6.2 38.93,33.46 38.93,45.72
N$16  (via drill 0.35)
  Top 0.508: Q4.1 R19.2 48.2,44.7 v52.07,44.7 | IC9.4 59.69,76.2 59.31,75.82 v59.31,68.83
  Bottom 0.508: v59.31,68.83 60.2,67.94 60.2,56.13 | 60.2,56.13 60.2,52.83 v52.07,44.7 | TP2.TP 60.2,56.13
N$17
  Top 0.508: IC2.6 92.2,75.82 92.46,76.07 | 92.46,76.07 92.46,76.71 92.08,77.09 IC2.7 | C7.1 R5.1 98.74,76.07 92.46,76.07
N$18
  Top 0.508: LED7.A 35.65,50.67 R14.1
N$19
  Bottom 2.54: EMSDC.3 EMSDC.4
N$20
  Top 0.508: R15.1 72.84,67.41 LED8.A
N$21
  Top 2.54: K6.4 31.75,11.43 72.39,11.43 K7.3
N$22
  Top 0.813: LED1.A 102.55,50.8 R20.2
N$25
  Top 0.508: LED4.A 43.05,84.9 R7.2
N$26
  Top 0.508: LED5.A R6.2
N$27
  Top 0.508: LED6.A R8.2
N$28
  Top 0.508: R10.1 C8.1 R11.2 78.17,79.31 80.39,77.09 IC2.2
N$32
  Top 0.508: IC2.5 90.68,74.49 C6.1
OK_HS  (via drill 0.65 pad 1.3)
  Top 0.508: OK2.2 32.89,61.59 31.24,63.25 TP10.TP
  Top 1.016: v118.11,10.16 93.98,10.16 91.06,13.08 v87,13.08 | v22.86,44.45 22.86,51.69 v27.05,55.88
  Bottom 1.016: ISOMETER_I/O.8 136.88,10.16 v118.11,10.16 | v87,13.08 42.8,13.08 34.29,21.59 34.29,36.83 26.67,44.45 v22.86,44.45 | v27.05,55.88 27.05,62.61 TP10.TP
PRECHARGE_EMSDC2
  Bottom 2.54: K6.3 52.07,26.67 100.33,26.67 104.29,30.63 104.29,69.7 99.69,74.3 82.29,91.7 EMSDC.1
PRECHARGE_SELECT
  Top 1.016: K2.5 94.32,33.95 D1.A 94.2,47.11 LED1.C 93.6,51.4 TP23.TP
  Bottom 0.889: BMS_I/O.7 38.33,41.91 87.63,41.91 97.79,31.75 K2.5
READY_POWER
  Top 0.889: THERMAL_EX_I/0.1 120.6,90.12 115.57,90.12 F2.1 110.44,87.63 59.49,87.63 50.6,96.52 21.59,96.52 WIFI_MODULE.1
  Top 1.27: F2.1 D2.2 115.88,67 116.84,66.04 116.84,64.77 118.11,63.5 127,63.5 136.04,54.46 BMS_POWER/GND.1
STARTUP_RESET  (via drill 0.35)
  Top 0.508: IC1.3 49.66,58.93 50.04,58.55 50.04,54.48 49.4,53.85 IC1.7 | IC2.3 83.44,75.82 82.55,74.93 82.55,71.12 83.89,69.78 R9.2 86.43,69.78 87.5,68.71 87.5,67.06 88.9,65.66 TP4.TP
  Top 0.813: v45.97,59.31 46.35,58.93 IC1.3
  Bottom 0.813: TP4.TP 79.94,65.66 78.48,67.11 66.24,67.11 62.23,71.12 56.52,71.12 53.34,67.94 53.34,64.77 48.26,64.77 46.66,63.17 46.66,61.84 45.97,61.16 v45.97,59.31